# EAGLE board Beeper (EAGLE 6.4)
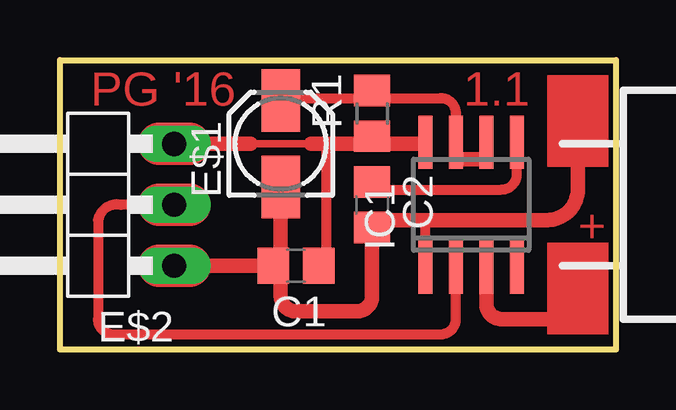
[diagram p0: board, top side]

Size 23.18 x 12.07 mm. Coordinates in mm from the lower left corner, seen from the top.
Outline: 0,0 0,12.07 23.18,12.07 23.18,0 0,0
Copper layers (1*16): Top 0.035mm / dielectric 1.5mm / Bottom 0.035mm
Design rules "default": minimum track width 10mil, minimum drill 24mil, track to track 8mil, track to pad 8mil, pad to pad 8mil, via to via 8mil, smd to smd 8mil, copper to edge 40mil, drill to drill 8mil, minimum pad ring 10mil, minimum via ring 8mil, stop-mask expansion 4mil, vias tented up to drill 0mil, thermal gap 10mil

## Footprints (pad centres in the part's own frame; a part is rotated, then mirrored left to right if it is on the bottom)
C0805 = smd 1.3 x 1.5: 1 -0.95,0; 2 0.95,0
153CLV-0405 = smd 2.6 x 1.6: + 1.8,0; - -1.8,0
1X03/90 = drill 1.016 long: 1 -2.54,-3.81; 2 0,-3.81; 3 2.54,-3.81
SO08 = smd 0.6 x 2.2: 1 -1.905,-2.6; 2 -0.635,-2.6; 3 0.635,-2.6; 4 1.905,-2.6; 5 1.905,2.6; 6 0.635,2.6; 7 -0.635,2.6; 8 -1.905,2.6
R0805 = smd 1.3 x 1.5: 1 -0.95,0; 2 0.95,0

## Placement (x,y rotation side)
C1  100nF  [C0805]  9.84,3.49 180 top
C2  10nF  [C0805]  13.02,6.03 270 top
E$1  1uF  [153CLV-0405]  9.21,8.57 90 top
E$2  [1X03/90]  0.95,6.03 90 top
IC1  NE555  [SO08]  17.14,6.03 0 top
R1  100K  [R0805]  13.02,9.84 90 top

## Library data of the parts
C1 C2 E$1 R1 = rcl
E$2 = pinhead
IC1 = smd-ipc

## Tracks (layer width: path | path; a pad name or v marks a point on that pad's centre or on a via)
GND
  Top 0.406: 15.24,4.13 15.24,5.4
  Top 0.61: 21.59,7.94 21.59,6.67 arc-90 20.32,5.4 15.24,5.4 13.02,5.4 13.02,2.22 arc-90 12.38,1.59 9.84,1.59 arc-90 9.21,2.22 9.21,3.49 | 5.4,3.49 9.21,3.49 | 9.21,3.49 9.21,6.03
  Top 1.778: 4.13,3.49 5.4,3.49
S$1
  Top 0.61: 16.51,7.94 17.78,7.94
S$2
  Top 0.406: 13.33,6.67 18.41,6.67 arc90 19.05,7.3 19.05,7.94
S$3
  Top 0.406: 9.84,10.48 15.88,10.48 arc-90 16.51,9.84 16.51,9.21
S$4
  Top 0.406: 4.13,6.03 2.54,6.03 arc90 1.59,5.4 1.59,1.27 arc90 2.22,0.63 15.88,0.63 arc90 16.51,1.27 16.51,2.86
  Top 1.778: 4.13,6.03 5.4,6.03
S$5
  Top 0.61: 17.78,2.54 17.78,1.91 arc90 18.41,1.27 20.64,1.27
VCC
  Top 0.305: 7.94,8.57 10.48,8.57
  Top 0.406: 10.48,3.49 11.11,3.49 11.11,8.57
  Top 0.61: 15.24,8.57 11.11,8.57 10.48,8.57 | 7.94,8.57 5.4,8.57
  Top 1.778: 4.13,8.57 5.4,8.57
(copper drawn outside any net)
  shapes: Top area x2

## Text on the board
Top: PG '16 | 1.1 | +
Document: VCC | I/O | GND
tDocu: + | BUZZER